# Altium PCB pcbGarra.PcbDoc
Units mm, origin at the board's own origin, x right, y up, seen from the top; angles counter-clockwise.
Board outline 136 x 36.2 mm, 2 copper layers (Top Layer, Bottom Layer); 24 components, 77 nets, 129 pads, 0 vias.
Unrouted connection lines stored in the file: 71.
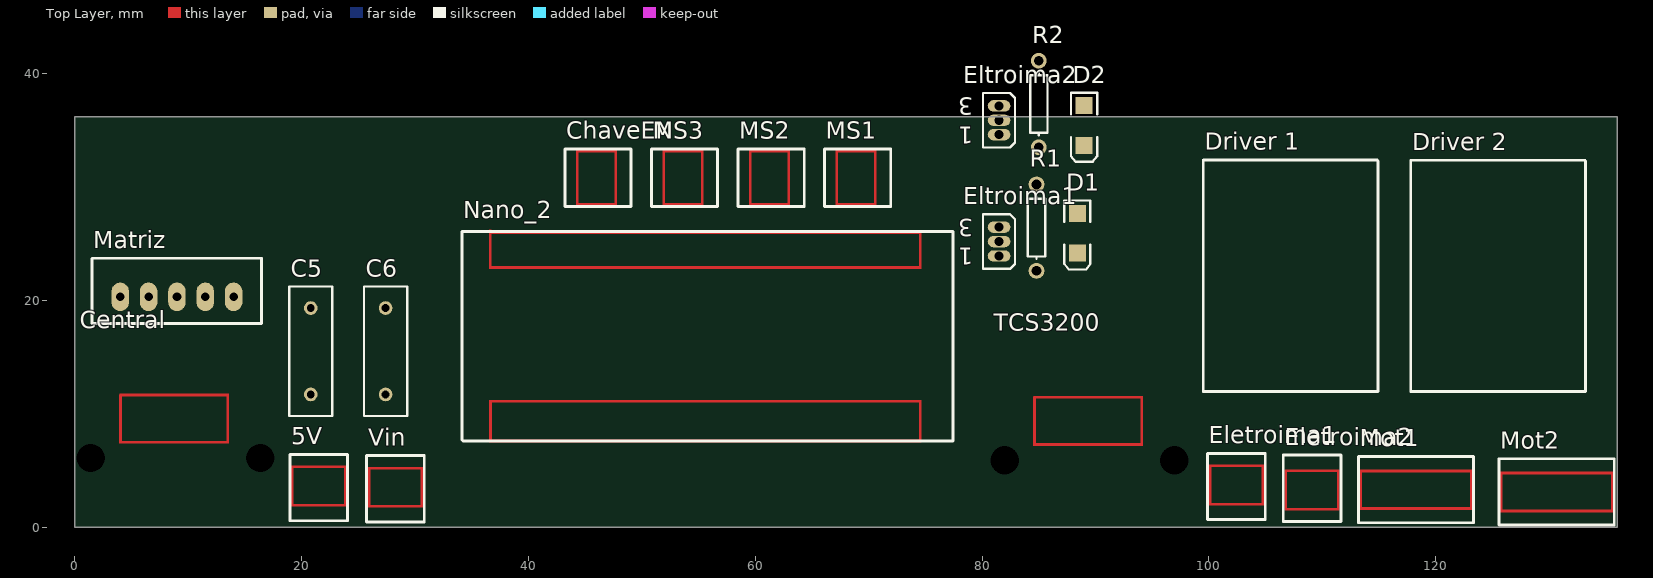
[diagram p0: Top Layer view]
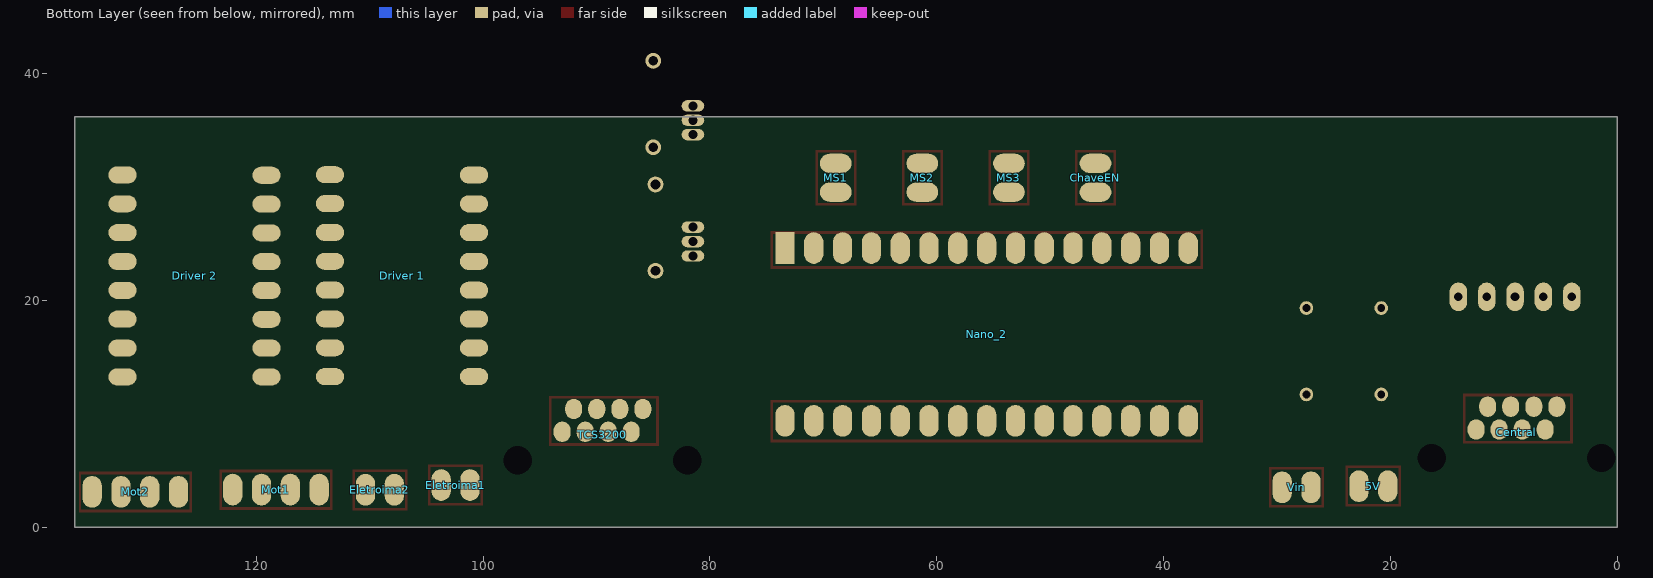
[diagram p1: Bottom Layer view, seen from below]

## Layer stack, top to bottom
Top Solder: solder mask 0.0102, Solder Resist, Dk 3.5
Top Layer: signal copper 0.0356
Dielectric 1: dielectric 0.32, FR-4, Dk 4.8
Bottom Layer: signal copper 0.0356
Bottom Solder: solder mask 0.0102, Solder Resist, Dk 3.5

## Board outline
0,0 136,0 136,36.2 0,36.2

## Design rules (kind name [scope] priority, off if disabled: settings)
Clearance [All] p1: gap=0.254 ignorepadtopadclearanceinfootprint=FALSE except(0: Arc-Hole Track-Hole SMDPad-Hole THPad-Hole Via-Hole Fill-Hole Poly-Hole Region-Hole Text-Hole)
PolygonConnect [All] p1: connectstyle=Relief reliefconductorwidth=0.254 reliefentries=4 polygonreliefangle="90 Angle" airgapwidth=0.254
RoutingVias [All] p1: holewidth=0.711 width=1.6 viastyle="Through Hole" minholewidth=0.711 minwidth=1.6 maxholewidth=0.711 maxwidth=1.6
SolderMaskExpansion [All] p1: expansion=0.102
UnRoutedNet [All] p1: checkbadconnections=TRUE
Width [All] p1: maxlimit=0.254 minlimit=0.254 preferedwidth=0.254
29 further rules are at their usual default settings.

## Components (designator, comment, footprint, x,y, rotation, side; value= is the part's Value field where it differs from the comment)
5V "KK2" 2-vias 21.5,3.6 r270 top
C5 "Cap" RAD-0.3 20.8,15.5 r90 top value=100pF
C6 "Cap" RAD-0.3 27.4,15.5 r90 top value=100pF
Central "RJ45" RJ45_Simples 2.53,6.08 r0 top
ChaveEN "KK2" 2-vias 46,30.8 r0 top
D1 "LED2" 3.2X1.6X1.1 88.4,25.9 r270 top
D2 "LED2" 3.2X1.6X1.1 89,35.4 r270 top
"Driver 1" "A4988" A4988 100.8,13.26 r90 top
"Driver 2" "A4988" A4988 119.1,13.24 r90 top
Eletroima1 "KK2" 2-vias 102.43,3.7 r270 top
Eletroima2 "KK2" 2-vias 109.1,3.287 r90 top
Eltroima1 "MOSFET-N" E3 81.5,25.17 r180 top
Eltroima2 "MOSFET-N" E3 81.5,35.87 r180 top
Matriz "JTS-XH (5T)" "JTS-XH (5T)" 14,20.3 r270 top
Mot1 "KK4" 4-vias 114.46,3.3 r90 top
Mot2 "KK4" 4-vias 126.86,3.1 r90 top
MS1 "KK2" 2-vias 68.9,30.8 r0 top
MS2 "KK2" 2-vias 61.267,30.8 r0 top
MS3 "KK2" 2-vias 53.633,30.8 r0 top
Nano_2 "Nano" Arduino_Nano 56.21,16.675 r180 top
R1 "Res1" AXIAL-0.3 84.8,26.4 r270 top value=1K
R2 "Res1" AXIAL-0.3 85,37.3 r90 top value=1K
TCS3200 "RJ45" RJ45_Simples 83.13,5.88 r0 top
Vin "KK2" 2-vias 28.27,3.5 r270 top

## Footprints (in the part's own frame and the unit in brackets; to place one, negate y for a bottom-side part, rotate by r counter-clockwise, add the part's x,y. Pads: shape width x height; smd on the part's side, far side on the other; paste and mask are expansions set on the pad)
2-vias [mm]
  oval 2.8x1.7 smd far side: 1(0,1.27) 2(0,-1.27)
  Top Layer region: 1.6,2.413 1.6,-2.413 1.778,-2.413 1.778,2.413
  Top Layer region: -1.791,2.413 -1.791,-2.413 -1.613,-2.413 -1.613,2.413
  Top Layer region: -1.676,-2.235 -1.676,-2.413 1.651,-2.413 1.651,-2.235
  Top Layer region: -1.676,2.413 -1.676,2.235 1.651,2.235 1.651,2.413
  silkscreen extent -2.79,-2.54 3.05,2.54, body extent -2.87,-2.54 2.97,2.54, height 11.7
3.2X1.6X1.1 [mm] "SMT LED; 2 Flat Leads"
  rect 1.5x1.5 smd: 1(-1.75,0) 2(1.75,0)
  silkscreen extent -2.9,-1.15 3.2,1.15
4-vias [mm]
  oval 2.8x1.7 smd far side: 1(0,0) 2(0,-2.54) 3(0,-5.08) 4(0,-7.62)
  Top Layer region: -1.778,1.041 -1.778,-8.636 -1.575,-8.636 -1.575,1.041
  Top Layer region: -1.778,-8.604 -1.778,-8.763 1.753,-8.763 1.753,-8.604
  Top Layer region: -1.778,1.149 -1.778,0.991 1.753,0.991 1.753,1.15
  Top Layer region: 1.549,1.016 1.549,-8.661 1.753,-8.661 1.753,1.016
  silkscreen extent -2.92,-8.89 2.92,1.27, body extent -2.92,-8.89 2.92,1.27, height 11.7
A4988 [mm]
  oval 1.5x2.5 smd far side: 1(0,0) 2(2.54,0) 3(5.08,0) 4(7.62,0) 5(10.16,0) 6(12.7,0) 7(15.24,0) 8(17.78,0) 9(0,-12.7) 10(2.544,-12.7) 11(5.087,-12.7) 12(7.631,-12.7) 13(10.175,-12.7) 14(12.718,-12.7) 15(15.262,-12.7) 16(17.805,-12.7)
  silkscreen extent -1.3,-14.12 19.1,1.3, body extent -1.27,-13.97 19.05,1.27, height 5.09
Arduino_Nano [mm]
  rect 1.7x2.8 smd far side: 0(-17.17,-7.925)
  oval 1.7x2.8 smd far side: 1(-14.63,-7.925) 2(-12.09,-7.925) 3(-9.55,-7.925) 4(-7.01,-7.925) 5(-4.47,-7.925) 6(-1.93,-7.925) 7(0.61,-7.925) 8(3.15,-7.925) 9(5.69,-7.925) 10(8.23,-7.925) 11(10.77,-7.925) 12(13.31,-7.925) 13(15.85,-7.925) 14(18.39,-7.925) 15(18.39,7.315) 16(15.85,7.315) 17(13.31,7.315) 18(10.77,7.315) 19(8.23,7.315) 20(5.69,7.315) 21(3.15,7.315) 22(0.61,7.315) 23(-1.93,7.315) 24(-4.47,7.315) 25(-7.01,7.315) 26(-9.55,7.315) 27(-12.09,7.315) 28(-14.63,7.315) 29(-17.17,7.315)
  Top Layer region: -18.44,9.194 -18.44,8.992 19.66,8.991 19.66,9.198
  Top Layer region: 19.456,9.068 19.456,5.563 19.66,5.563 19.66,9.068
  Top Layer region: -18.44,9.068 -18.44,5.537 -18.237,5.537 -18.237,9.068
  Top Layer region: -18.44,5.689 -18.44,5.487 19.66,5.486 19.66,5.694
  Top Layer region: -18.44,-9.195 -18.44,-9.398 19.66,-9.399 19.66,-9.191
  Top Layer region: -18.44,-6.121 -18.44,-9.36 -18.237,-9.36 -18.237,-6.121
  Top Layer region: -18.415,-6.097 -18.415,-6.299 19.685,-6.3 19.685,-6.092
  Top Layer region: 19.482,-6.299 19.482,-9.538 19.685,-9.538 19.685,-6.299
  silkscreen extent -21.23,-9.37 22.07,9.09
AXIAL-0.3 [mm] "Axial Device, Thru-Hole; 2 Leads; 0.3 in Pin Spacing"
  round 1.4 hole 0.85: 1(-3.81,0) 2(3.81,0)
  silkscreen extent -2.77,-0.76 2.77,0.76
E3 [mm] "TO, Flat Index; 3 In-Line, Axial Leads; Body Dia. 4.6mm; Lead Dia. 0.5 mm (max)"
  oval 2x1 hole 0.8: 1(0,1.27) 2(0,0) 3(0,-1.27)
  silkscreen extent -1.41,-2.41 1.41,2.41
"JTS-XH (5T)" [mm]
  oval 2.524x1.54 hole 0.762: 1(0,0) 2(0,-2.5) 3(0,-5) 4(0,-7.5) 5(0,-10)
  silkscreen extent -3.4,-12.5 2.34,2.46, body extent -3.41,-12.45 2.34,2.45, height 7.01
RAD-0.3 [mm] "Radial Cap, Thru-Hole; 2 Leads; 0.3 in Pin Spacing"
  round 1.2 hole 0.7: 1(-3.81,0) 2(3.81,0)
  silkscreen extent -5.71,-1.91 5.71,1.91
RJ45_Simples [mm] "Sem led nessas porra - 8P8C"
  oval 1.5x1.8 smd far side: 1(9.9,2.52) 2(8.88,4.53) 3(7.87,2.52) 4(6.85,4.53) 5(5.84,2.52) 6(4.82,4.53) 7(3.81,2.52) 8(2.79,4.53)
  round 0 hole 2.5: HOLE(-1.13,0) HOLE(13.83,0)
  Top Layer region: 1.422,5.664 1.422,5.461 11.049,5.461 11.049,5.665
  Top Layer region: 10.846,5.639 10.846,1.346 11.049,1.346 11.049,5.639
  Top Layer region: 1.397,1.498 1.397,1.295 11.024,1.295 11.024,1.499
  Top Layer region: 1.397,5.588 1.397,1.295 1.6,1.295 1.6,5.588
  body extent -1.55,-5.51 14.25,10.69, height 12.84

## Part data
5V ChaveEN Eletroima1 Eletroima2 MS1 MS2 MS3 Vin: library part KK2Vias
C5 C6: "Capacitor", LatestRevisionDate=17-Jul-2002, LatestRevisionNote="Re-released for DXP Platform.", PackageDescription="Radial Cap, Thru-Hole; 2 Leads; 0.3 in Pin Spacing", PackageReference=RAD-0.3, Published=8-Jun-2000, Publisher="Altium Limited"
D1 D2: "Typical RED, GREEN, YELLOW, AMBER GaAs LED", LatestRevisionDate=17-Jul-2002, LatestRevisionNote="Re-released for DXP Platform.", PackageDescription="SM LED; 2 Flat Leads", PackageReference=3.2X1.6X1.1, PackageVersion=Feb-2002, Published=8-Jun-2000, Publisher="Altium Limited"
Eltroima1 Eltroima2: "N-Channel MOSFET", LatestRevisionDate=17-Jul-2002, LatestRevisionNote="Re-released for DXP Platform.", PackageDescription="TO, Flat Index; 3 In-Line, Axial Leads; Body Dia. 4.6mm; Lead Dia. 0.5 mm (max)", PackageReference=E3, PackageVersion=1995/1996, Published=8-Jun-2000, Publisher="Altium Limited"
Mot1 Mot2: library part KK4Vias, ComponentLink1Description=Fabricante, ComponentLink1URL=https://www.molex.com/molex/products/family?key=kk_254_rpc_connector_system&channel=products&chanName=family&pageTitle=Introduction&parentKey=kk_interconnect_solutions
Nano_2: library part Arduino_Nano
R1 R2: "Resistor", LatestRevisionDate=17-Jul-2002, LatestRevisionNote="Re-released for DXP Platform.", PackageDescription="Axial Device, Thru-Hole; 2 Leads; 0.3 in Pin Spacing", PackageReference=AXIAL-0.3, Published=8-Jun-2000, Publisher="Altium Limited"

## Nets (pads, with @x,y where several pads share a name; then routed paths per layer and width w, separated by ;. In a path a pad name is that pad's centre, name@x,y a point inside that pad or via, vN(x,y) a via of type N, cw(c..) or ccw(c..) an arc to the next point about the centre after c; other vN are vias at no path point)
1A_M1: "Driver 1.12" Mot1.3
1A_M2: "Driver 2.12" Mot2.3
1B_M1: "Driver 1.13" Mot1.4
1B_M2: "Driver 2.13" Mot2.4
2A_M1: "Driver 1.11" Mot1.2
2A_M2: "Driver 2.11" Mot2.2
2B_M1: "Driver 1.10" Mot1.1
2B_M2: "Driver 2.10" Mot2.1
3VCC: 
5V: 5V.2 "Driver 1.14" "Driver 2.14" C5.1 ChaveEN.2 Matriz.5 MS1.2 MS2.2 MS3.2 Nano_2.26 TCS3200.8
5VCC: 
ChA_1: 
ChA_2: 
ChA_3: 
ChB_1: 
ChB_2: 
ChB_3: 
DIR_M1: "Driver 1.7" Nano_2.4
DIR_M2: "Driver 2.7" Nano_2.23
Eletro1: Eltroima1.2 Nano_2.7
Eletro2: Eltroima2.2 Nano_2.8
GND: 5V.1 "Driver 1.15" "Driver 2.15" C5.2 Matriz.4 Nano_2.28 TCS3200.4 TCS3200.6
GND_MOT: "Driver 1.9" "Driver 2.9" C6.2 Vin.1
MISO: Central.8 Nano_2.14
MISO_D12: 
MOSI: Central.6 Nano_2.13
MOSI_D11: 
MS1: "Driver 1.1" "Driver 2.1" MS1.1
MS2: "Driver 1.2" "Driver 2.2" MS2.1
MS3: "Driver 1.3" "Driver 2.3" MS3.1
NetC3_2: 
NetC4_1: 
NetChaveEN_1: "Driver 1.16" "Driver 2.16" ChaveEN.1
NetD1_1: D1.1 R1.1
NetD1_2: D1.2 Eletroima1.1 Eltroima1.3
NetD2_1: D2.1 R2.2
NetD2_2: D2.2 Eletroima2.1 Eltroima2.3
NetEletroima1_2: Eletroima1.2 Eltroima1.1 R1.2
NetEletroima2_2: Eletroima2.2 Eltroima2.1 R2.1
NetEncoder_6_2: 
NetEncoder_6_3: 
NetLDR_1_2_1: 
NetLDR_1_2_3: 
NetLDR_1_2_5: 
NetLDR_1_2_7: 
NetLDR_2_2_2: 
NetLDR_2_2_4: 
NetLDR_2_2_6: 
NetLDR_2_2_8: 
NetMatriz_1: Matriz.1 Nano_2.9
NetMatriz_2: Matriz.2 Nano_2.10
NetMatriz_3: Matriz.3 Nano_2.11
NetNano_1_10: 
NetNano_2_18: Nano_2.18 TCS3200.2
NetNano_2_19: Nano_2.19 TCS3200.1
NetNano_2_20: Nano_2.20 TCS3200.3
NetNano_2_21: Nano_2.21 TCS3200.5
NetNano_2_22: Nano_2.22 TCS3200.7
RST_D: "Driver 1.4" "Driver 2.4" Nano_2.6
S0: 
S1: 
S3: 
SCK: Central.2 Nano_2.15
Servo1: 
Servo2: 
Servo3: 
Servo4: 
SLEEP: "Driver 1.5" "Driver 2.5" Nano_2.24
SS: Central.4 Nano_2.12
SS_D10: 
STP_M1: "Driver 1.6" Nano_2.5
STP_M2: "Driver 2.6" Nano_2.25
TCS_OUT_1: 
TCS_OUT_2: 
TCS_OUT_3: 
TCS_OUT_4: 
Vin: "Driver 1.8" "Driver 2.8" C6.1 Vin.2
pads on no net: Central.1 Central.3 Central.5 Central.7 Central.HOLE Nano_2.0 Nano_2.1 Nano_2.2 Nano_2.3 Nano_2.16 Nano_2.17 Nano_2.27 Nano_2.29 TCS3200.HOLE

## Text inside footprints (layer, text, board x,y; h text height)
Eltroima1: Top Overlay "1" at 79.225,24.615 h1.5 r180; Top Overlay "3" at 79.225,27.133 h1.5 r180
Eltroima2: Top Overlay "1" at 79.225,35.315 h1.5 r180; Top Overlay "3" at 79.225,37.833 h1.5 r180